# Altium PCB Indicator Display.PcbDoc
Units mm, origin at the board's own origin, x right, y up, seen from the top; angles counter-clockwise.
Board outline 60 x 20 mm, 2 copper layers (Top Layer, Bottom Layer); 20 components, 29 nets, 70 pads, 3 vias.
Unrouted connection lines stored in the file: 2.
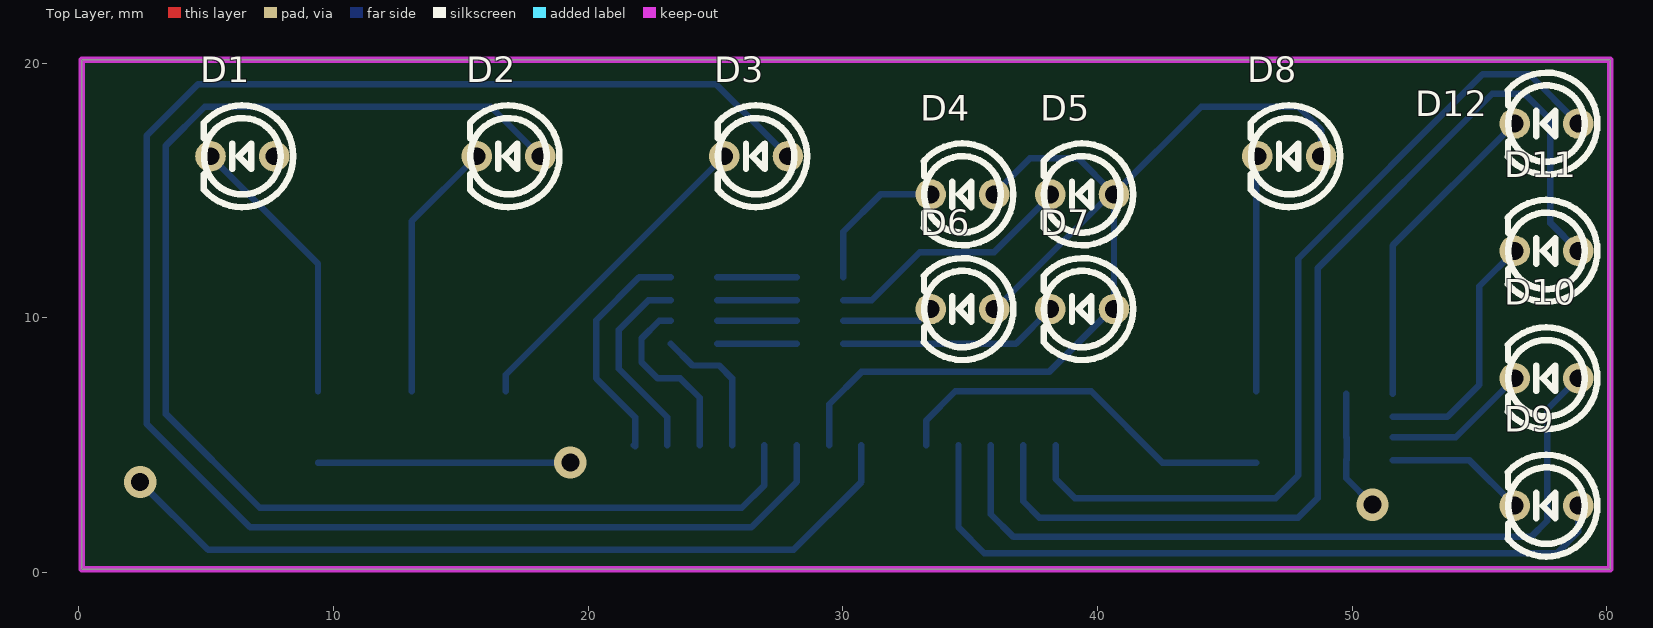
[diagram p0: Top Layer view]
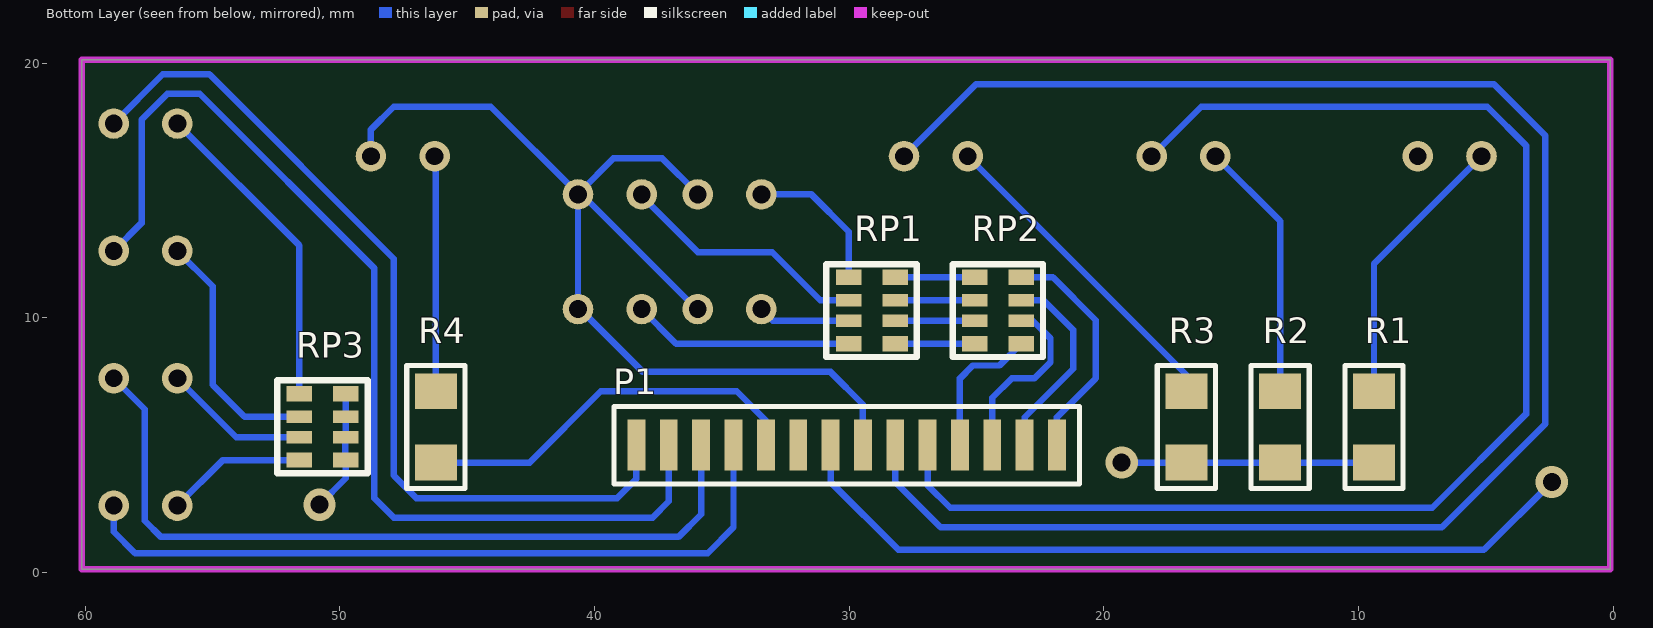
[diagram p1: Bottom Layer view, seen from below]
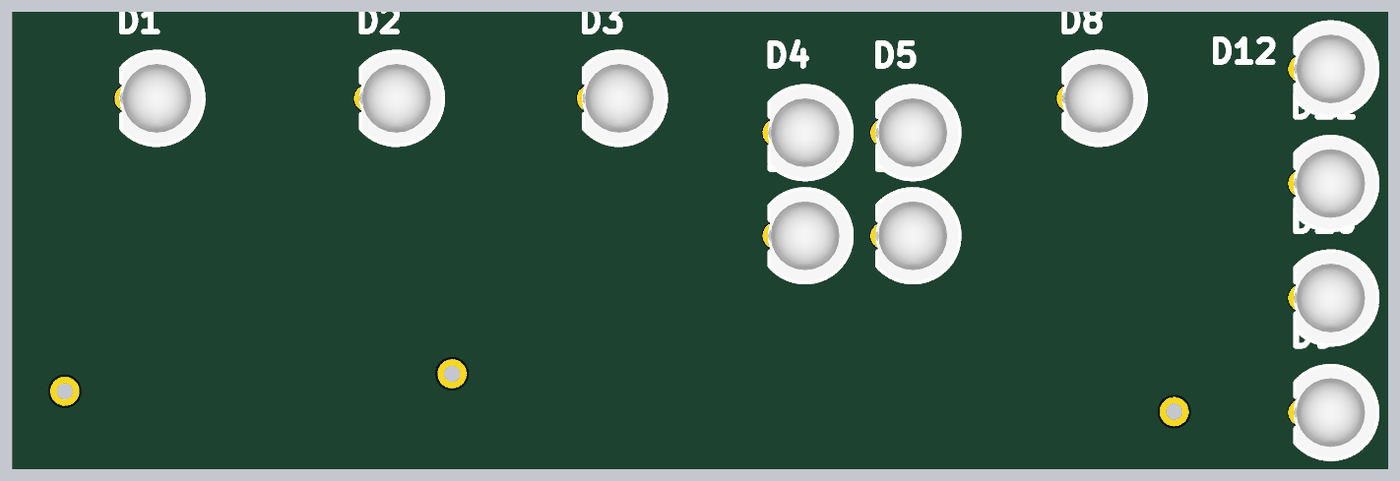
[diagram p2: 3D render of the assembled board from above, using the file's embedded part models]
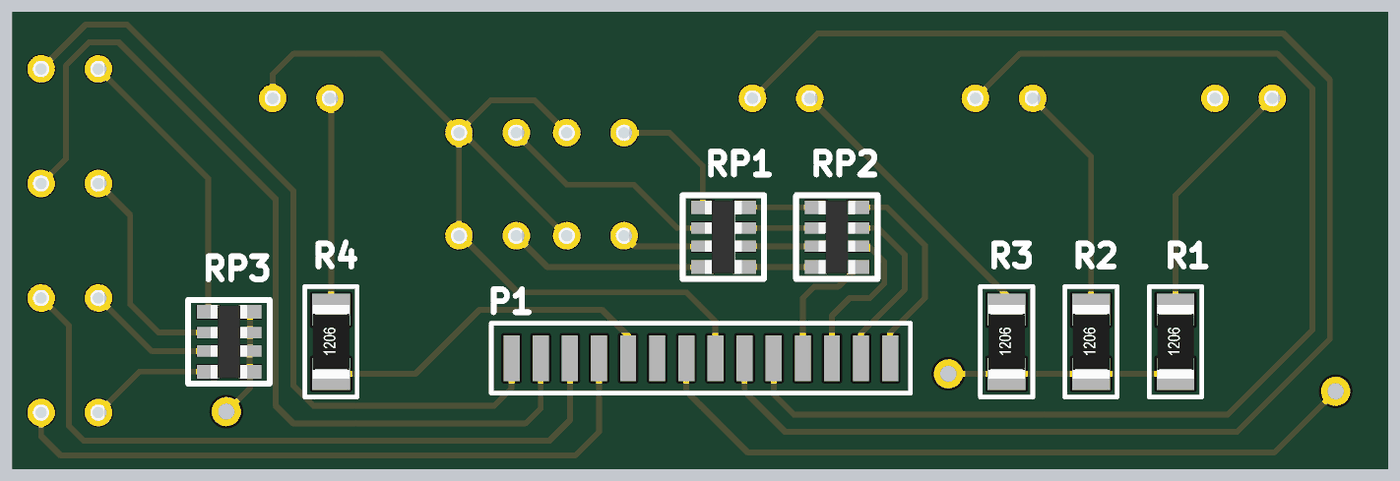
[diagram p3: 3D render of the assembled board from below, using the file's embedded part models]

## Layer stack, top to bottom
Top Solder: solder mask 0.0102, Solder Resist, Dk 3.5
Top Layer: signal copper 0.0356
Dielectric 1: dielectric 0.32, FR-4, Dk 4.8
Bottom Layer: signal copper 0.0356
Bottom Solder: solder mask 0.0102, Solder Resist, Dk 3.5

## Board outline
0.127,0.127 0.127,20.127 60.127,20.127 60.127,0.127

## Design rules (kind name [scope] priority, off if disabled: settings)
Clearance [All] p1: gap=0.254 ignorepadtopadclearanceinfootprint=FALSE except(0: Arc-Hole Track-Hole SMDPad-Hole THPad-Hole Via-Hole Fill-Hole Poly-Hole Region-Hole Text-Hole)
PolygonConnect [All] p1: connectstyle=Relief reliefconductorwidth=0.254 reliefentries=4 polygonreliefangle="90 Angle" airgapwidth=0.254
RoutingVias [All] p1: holewidth=0.711 width=1.27 viastyle="Through Hole" minholewidth=0.711 minwidth=1.27 maxholewidth=0.711 maxwidth=1.27
SolderMaskExpansion [All] p1: expansion=0.102 istentingtop=FALSE
Width [All] p1: maxlimit=0.254 minlimit=0.254 preferedwidth=0.254
30 further rules are at their usual default settings.

## Components (designator, comment, footprint, x,y, rotation, side; value= is the part's Value field where it differs from the comment)
D1 "SMD LED" "LED RED 3MM S" 6.427,16.344 r180 top
D2 "SMD LED" "LED RED 3MM S" 16.877,16.344 r180 top
D3 "SMD LED" "LED RED 3MM S" 26.599,16.344 r180 top
D4 "SMD LED" "LED RED 3MM S" 34.699,14.845 r180 top
D5 "SMD LED" "LED RED 3MM S" 39.399,14.845 r180 top
D6 "SMD LED" "LED RED 3MM S" 34.699,10.344 r180 top
D7 "SMD LED" "LED RED 3MM S" 39.399,10.344 r180 top
D8 "SMD LED" "LED RED 3MM S" 47.527,16.344 r180 top
D9 "SMD LED" "LED RED 3MM S" 57.627,2.627 r180 top
D10 "SMD LED" "LED RED 3MM S" 57.627,7.627 r180 top
D11 "SMD LED" "LED RED 3MM S" 57.627,12.627 r180 top
D12 "SMD LED" "LED RED 3MM S" 57.627,17.627 r180 top
P1 "Header 14" HDR1X14 13.589,5 r0 bottom
R1 "PTS120630V012" "1206 Resistor" 9.398,5.715 r90 bottom
R2 "PTS120630V012" "1206 Resistor" 13.081,5.715 r90 bottom
R3 "PTS120630V012" "1206 Resistor" 16.764,5.715 r90 bottom
R4 "PTS120630V012" "1206 Resistor" 46.228,5.715 r90 bottom
RP1 "Resistor Pack 4x1" RP4x0603 29.108,10.287 r180 bottom
RP2 "Resistor Pack 4x1" RP4x0603 24.155,10.287 r180 bottom
RP3 "Resistor Pack 4x1" RP4x0603 50.673,5.715 r180 bottom

## Footprints (in the part's own frame and the unit in brackets; to place one, negate y for a bottom-side part, rotate by r counter-clockwise, add the part's x,y. Pads: shape width x height; smd on the part's side, far side on the other; paste and mask are expansions set on the pad)
"1206 Resistor" [mil]
  rect 55x65 smd: 1(-55,0) 2(55,0)
  silkscreen extent -95,-45 95,45, body extent -63,-31 63,31, height 24
HDR1X14 [mm] "Connector; Header; 14 Position"
  rect 0.7x2 smd: 1(8.255,0) 2(9.525,0) 3(10.795,0) 4(12.065,0) 5(13.335,0) 6(14.605,0) 7(15.875,0) 8(17.145,0) 9(18.415,0) 10(19.685,0) 11(20.955,0) 12(22.225,0) 13(23.495,0) 14(24.765,0)
  silkscreen extent 7.37,-1.52 25.65,1.52
"LED RED 3MM S" [mm]
  round 1.2 hole 0.7 mask+0.05: 1(-1.25,0) 2(1.25,0)
  silkscreen extent -2,-2 1.51,2, body extent -2,-2 1.5,2, height 5.2
RP4x0603 [mm]
  rect 1x0.6 smd mask+0.03: 1(-0.912,1.3) 4(-0.912,-1.3) 5(0.913,-1.3) 8(0.913,1.3)
  rect 1x0.5 smd mask+0.03: 2(-0.912,0.4) 3(-0.912,-0.4) 6(0.913,-0.4) 7(0.913,0.4)
  silkscreen extent -1.79,-1.83 1.76,1.83, body extent -0.81,-1.6 0.79,1.6, height 0.55

## Part data
D1 D2 D3 D4 D5 D6 D7 D8 D9 D10 D11 D12: library part "LED SMD"
P1: "Header, 14-Pin", LatestRevisionDate=17-Jul-2002, LatestRevisionNote="Re-released for DXP Platform.", Publisher="Altium Limited"
RP1 RP2 RP3: library part "Resistor Pack 4*1"

## Via types
v1: diameter 1.27, hole 0.711, Top Layer to Bottom Layer, 3 vias

## Nets (pads, with @x,y where several pads share a name; then routed paths per layer and width w, separated by ;. In a path a pad name is that pad's centre, name@x,y a point inside that pad or via, vN(x,y) a via of type N, cw(c..) or ccw(c..) an arc to the next point about the centre after c; other vN are vias at no path point)
+5: D4.1 D5.1 D6.1 D7.1 D8.1 P1.7 | length 42.3
  Bottom Layer w0.254: P1.7 29.464,6.604 30.734,7.874 38.1,7.874 40.649,10.423 D5.1@40.649,14.868 ; D4.1 35.949,14.867 37.338,16.256 39.261,16.256 D5.1@40.585,14.931 ; D6.1 35.949,10.295 D5.1@40.585,14.931 ; D8.1 48.777,17.39 47.879,18.288 44.069,18.288 D5.1@40.649,14.868 ; D5.1@40.585,14.931 D5.1@40.649,14.868
GND: P1.8 R1.1 R2.1 R3.1 RP3.5 RP3.6 RP3.7 RP3.8 | length 46.7
  Bottom Layer w0.254: v1(2.413,3.556) 5.08,0.889 28.067,0.889 30.734,3.556 P1.8 ; R1.1 R2.1 R3.1 v1(19.304,4.318) ; RP3.5 RP3.5@49.771,4.425 ; RP3.8 RP3.7 RP3.6 49.781,5.295 49.781,4.435 RP3.5@49.771,4.425 ; v1(50.8,2.667) 49.771,3.696 RP3.5@49.771,4.425
NetD1_2: D1.2 R1.2 | length 11
  Bottom Layer w0.254: D1.2 9.398,12.123 R1.2
NetD2_1: D2.1 P1.5 | length 53.6
  Bottom Layer w0.254: D2.1 16.183,18.288 4.953,18.288 3.429,16.764 3.429,6.223 7.112,2.54 26.035,2.54 26.924,3.429 P1.5
NetD2_2: D2.2 R2.2 | length 10.3
  Bottom Layer w0.254: R2.2 13.081,13.798 D2.2
NetD3_1: D3.1 P1.6 | length 67.9
  Bottom Layer w0.254: D3.1 25.016,19.177 4.699,19.177 2.667,17.145 2.667,5.842 6.731,1.778 26.416,1.778 28.194,3.556 P1.6
NetD3_2: D3.2 R3.2 | length 12.8
  Bottom Layer w0.254: R3.2 16.764,7.759 D3.2
NetD4_2: D4.2 RP1.1 | length 5.8
  Bottom Layer w0.254: RP1.1 30.02,13.383 31.482,14.845 D4.2
NetD5_2: D5.2 RP1.2 | length 9.9
  Bottom Layer w0.254: RP1.2 31.134,10.687 33.02,12.573 35.941,12.573 38.149,14.781 D5.2
NetD6_2: D6.2 RP1.3 | length 3.6
  Bottom Layer w0.254: RP1.3 33.001,9.887 33.458,10.344 D6.2
NetD7_2: D7.2 RP1.4 | length 8.7
  Bottom Layer w0.254: RP1.4 36.8,8.987 38.149,10.336 D7.2
NetD8_2: D8.2 R4.2 | length 9.2
  Bottom Layer w0.254: R4.2 D8.2@46.228,16.344
NetD9_1: D9.1 P1.11 | length 29.3
  Bottom Layer w0.254: P1.11 34.544,1.778 35.56,0.762 58.039,0.762 58.877,1.6 D9.1
NetD9_2: D9.2 RP3.4 | length 5.5
  Bottom Layer w0.254: RP3.4 54.589,4.415 D9.2
NetD10_1: D10.1 P1.12 | length 31.3
  Bottom Layer w0.254: P1.12 35.814,2.286 36.703,1.397 57.023,1.397 57.658,2.032 57.658,6.408 D10.1
NetD10_2: D10.2 RP3.3 | length 5.7
  Bottom Layer w0.254: RP3.3 54.065,5.315 D10.2
NetD11_1: D11.1 P1.13 | length 41.4
  Bottom Layer w0.254: P1.13 37.084,2.794 37.719,2.159 47.879,2.159 48.641,2.921 48.641,11.938 55.499,18.796 56.769,18.796 57.785,17.78 57.785,13.719 D11.1
NetD11_2: D11.2 RP3.2 | length 9.8
  Bottom Layer w0.254: RP3.2 53.74,6.115 54.991,7.366 54.991,11.241 D11.2
NetD12_1: D12.1 P1.14 | length 34.8
  Bottom Layer w0.254: P1.14 38.354,3.683 39.116,2.921 46.99,2.921 47.879,3.81 47.879,12.319 55.118,19.558 56.946,19.558 D12.1
NetD12_2: D12.2 RP3.1 | length 12.6
  Bottom Layer w0.254: RP3.1 51.585,12.835 D12.2
NetP1_1: P1.1 RP2.8 | length 9.3
  Bottom Layer w0.254: RP2.8 22.001,11.587 20.32,9.906 20.32,7.62 21.844,6.096 P1.1 ; P1.1 21.844,4.953 21.797,5 P1.1
NetP1_2: P1.2 RP2.7 | length 7.8
  Bottom Layer w0.254: P1.2 23.114,6.096 21.209,8.001 21.209,9.525 22.371,10.687 RP2.7
NetP1_3: P1.3 RP2.6 | length 7.1
  Bottom Layer w0.254: RP2.6 22.793,9.887 22.098,9.192 22.098,8.255 22.733,7.62 23.622,7.62 24.384,6.858 P1.3
NetP1_4: P1.4 RP2.5 | length 5.6
  Bottom Layer w0.254: RP2.5 24.101,8.128 25.146,8.128 25.654,7.62 P1.4
NetP1_10: P1.10 R4.1 | length 15.6
  Bottom Layer w0.254: P1.10 33.274,5.969 34.417,7.112 39.751,7.112 42.545,4.318 R4.1
NetRP1_5: RP1.5 RP2.4 | length 3.1
  Bottom Layer w0.254: RP2.4 RP1.5
NetRP1_6: RP1.6 RP2.3 | length 3.1
  Bottom Layer w0.254: RP2.3 RP1.6
NetRP1_7: RP1.7 RP2.2 | length 3.1
  Bottom Layer w0.254: RP2.2 RP1.7
NetRP1_8: RP1.8 RP2.1 | length 3.1
  Bottom Layer w0.254: RP2.1 RP1.8
pads on no net: D1.1 P1.9

## Keep-outs
Keep-Out Layer:
  the board outline again, w0.254

## Silkscreen, mask and mechanical layers (free items; w line width, h text height)
Top Overlay:
  drawing of 539 lines, arcs and shapes, not listed